# Altium PCB Sinistro_CLK_RevB.PcbDoc (part 6 of 6)
Units mil, origin at the board's own origin, x right, y up, seen from the top; angles counter-clockwise.
Board outline 5905.51 x 4330.71 mil, 10 copper layers (Top Layer (.GTL), MidLayer1 (*.G1), +12V (*.GP1), -12V (*.GP2), A & GND (*.GP3), Chassis E (*.GP4), +28V & VCC (*.GP5), MidLayer2 (*.G2), MidLayer3 (*.G3), Bottom Layer (.GBL)), stack 64.6 mil thick; 495 components, 327 nets, 1939 pads, 938 vias.
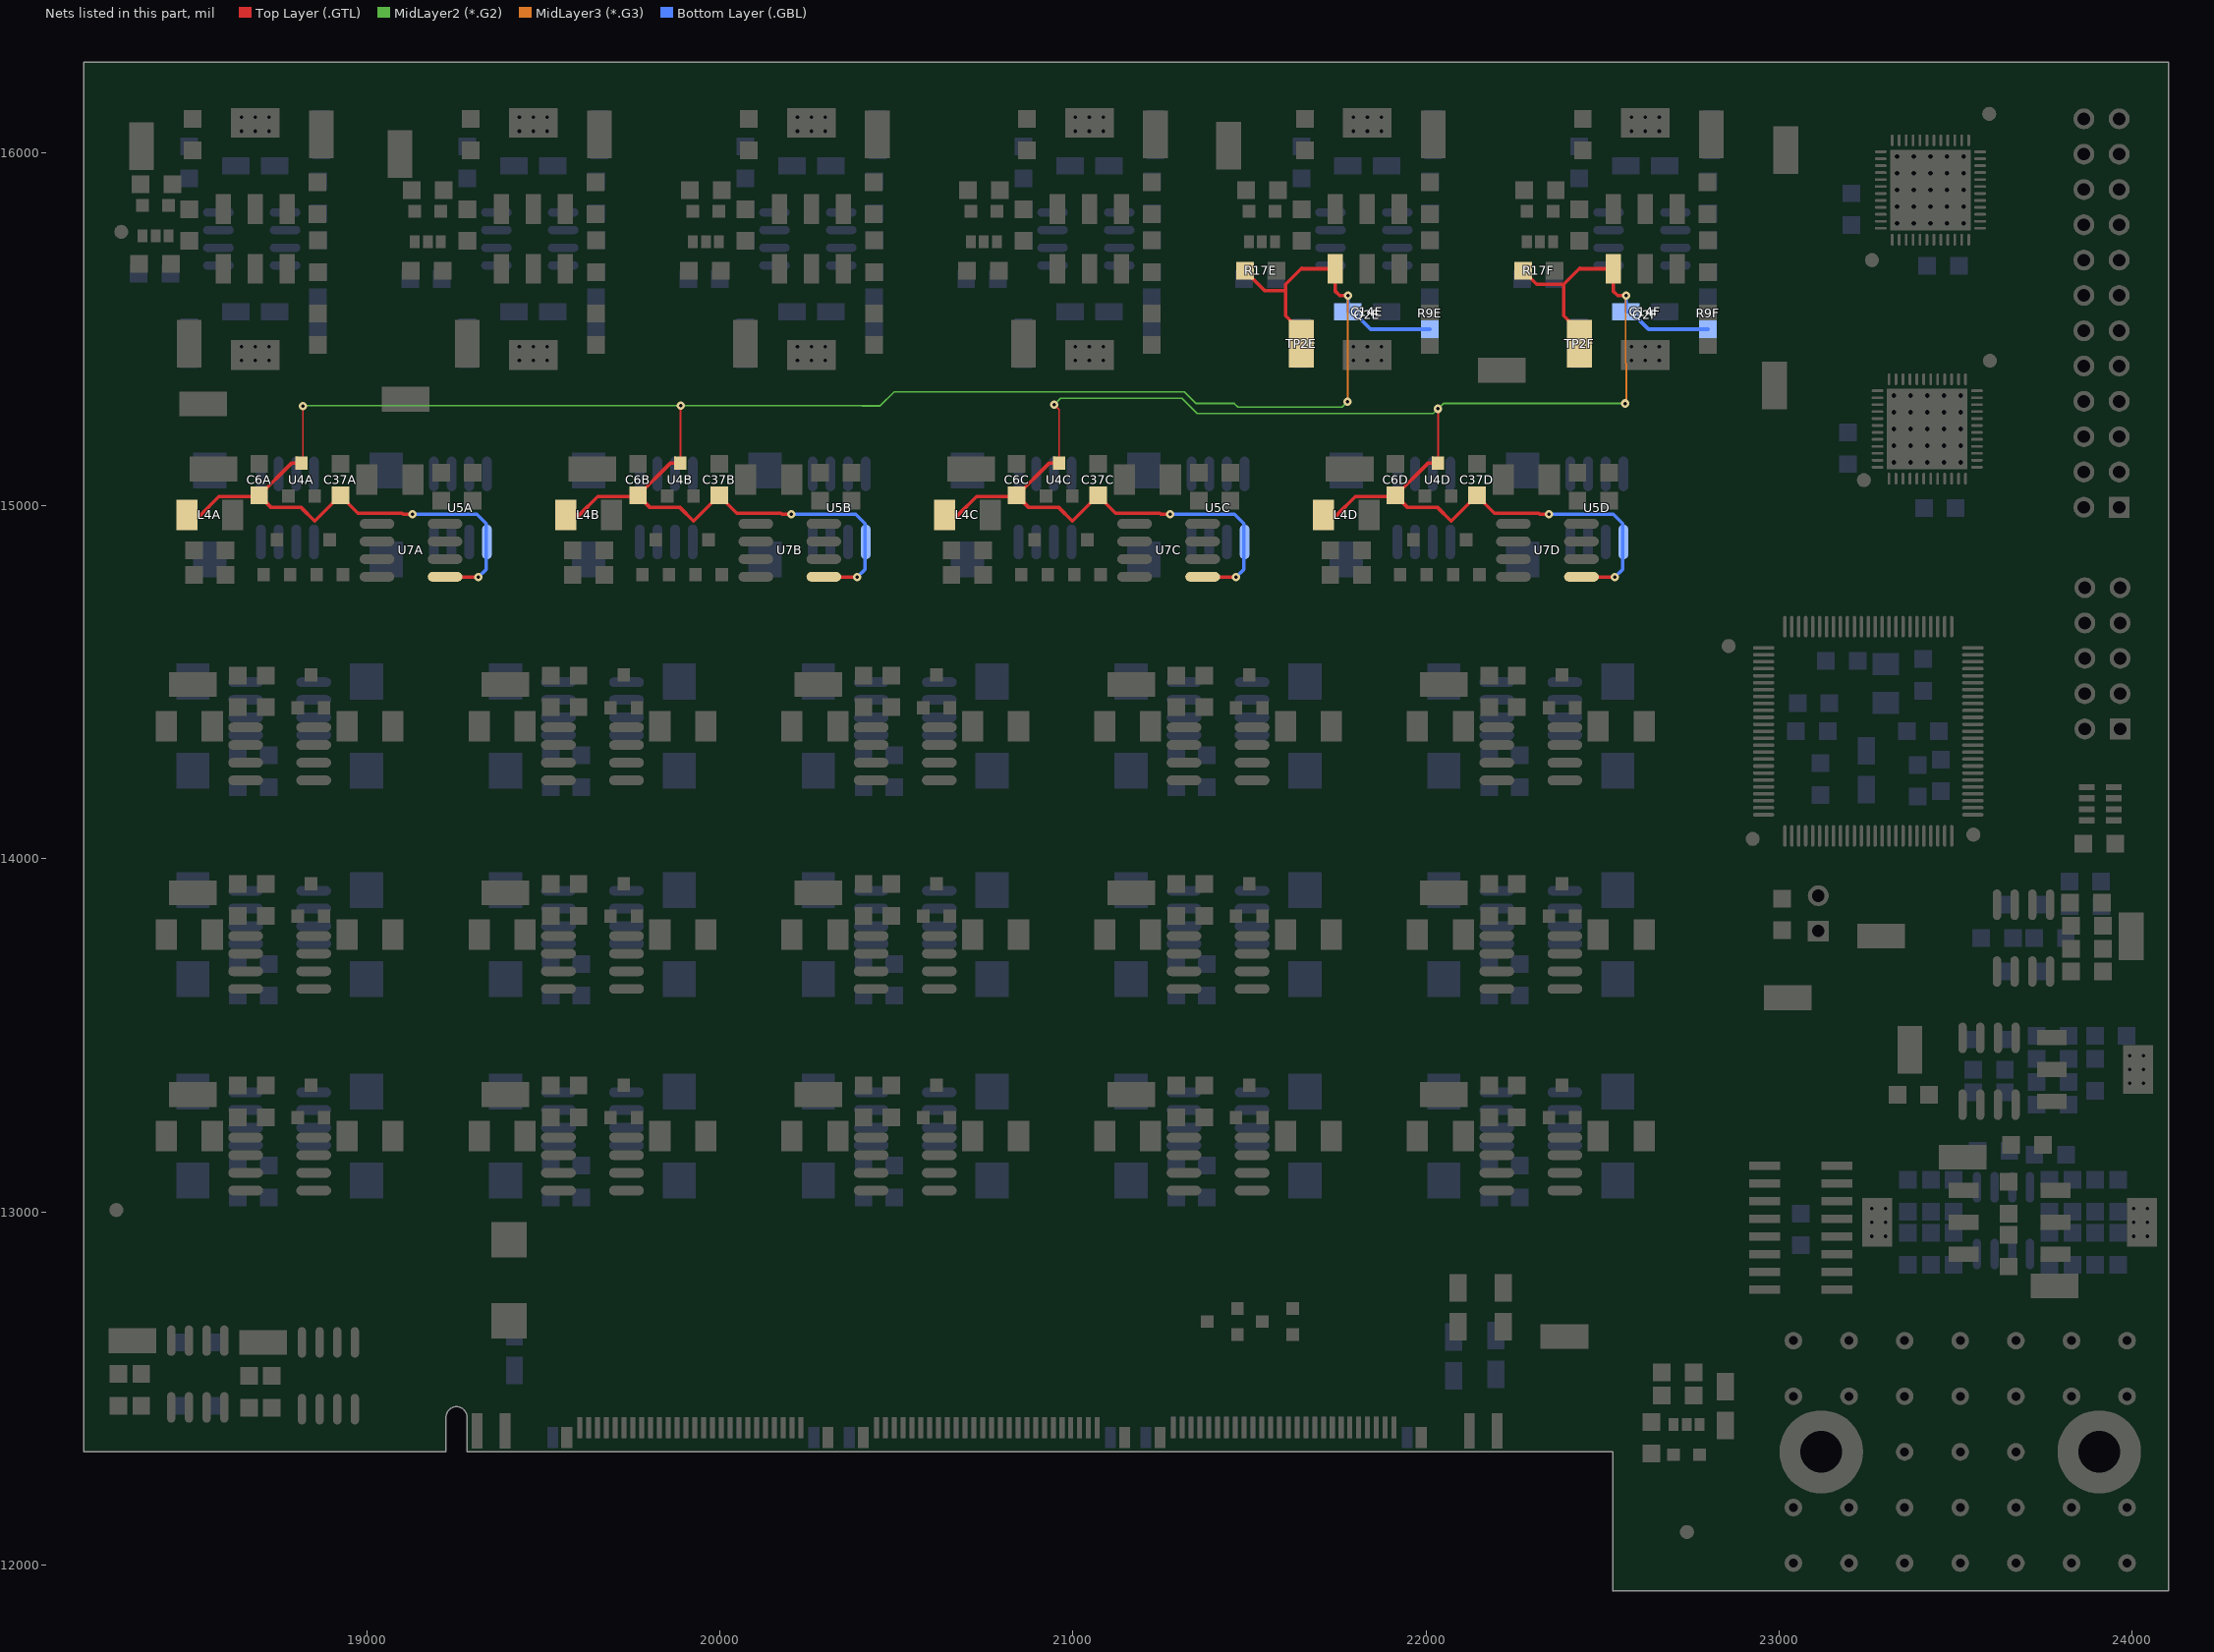
[diagram p14: the nets of this part, all layers, seen from the top]

## Via types
v1: diameter 24, hole 10, Top Layer (.GTL) to Bottom Layer (.GBL), 938 vias

## Nets (pads, with @x,y where several pads share a name; then routed paths per layer and width w, separated by ;. In a path a pad name is that pad's centre, name@x,y a point inside that pad or via, vN(x,y) a via of type N, cw(c..) or ccw(c..) an arc to the next point about the centre after c; other vN are vias at no path point) (continued)
VREFLO5: C6A.1 C6B.1 C14E.2 C37A.1 C37B.1 L4A.1 L4B.1 Q2E.3 R9E.1 R17E.2 TP2E.1 U4A.3 U4B.3 U5A.5 U5B.5 U7A.5 U7B.5 | length 7271.9
  Top Layer (.GTL) w5: U4A.3@18815.4,15119.57 18819,15123.17 v1(18819,15281) ; U4B.3@19888.24,15119.57 U4B.3@19891.83,15123.17 ; U4B.3@19889,15120.33 v1(19889,15283)
  Top Layer (.GTL) w10: L4A.1@18490.4,14973.31 18529.4,14973.31 18581.4,15025.31 18692.4,15025.31 C6A.1@18695.4,15028.31 ; U4A.3@18815.4,15119.57 18786.66,15119.57 C6A.1@18695.4,15028.31 ; v1(19130,14975) 19103.71,14975 19100.4,14978.31 18975.4,14978.31 C37A.1@18925.4,15028.31 18852.9,14955.81 18814.4,14994.31 18729.4,14994.31 C6A.1@18695.4,15028.31 ; U7A.5@19221.86,14798.31 19223.17,14797 v1(19316,14797) ; L4B.1@19563.24,14973.31 19602.24,14973.31 19654.24,15025.31 19765.24,15025.31 C6B.1@19768.24,15028.31 ; U4B.3@19888.24,15119.57 19859.5,15119.57 C6B.1@19768.24,15028.31 ; v1(20202.83,14975) 20176.54,14975 20173.24,14978.31 20048.24,14978.31 C37B.1@19998.24,15028.31 19925.74,14955.81 19887.24,14994.31 19802.24,14994.31 C6B.1@19768.24,15028.31 ; U7B.5@20294.69,14798.31 20296,14797 v1(20388.83,14797) ; R17E.2@21487.21,15665 21544.2,15608 21602.61,15608 ; TP2E.1@21646.9,15459.76 21646.9,15493.23 21602.61,15537.52 21602.61,15608 ; 21648.31,15672.09 21602.61,15626.38 21602.61,15608 ; 21650.01,15670.39 Q2E.3@21743.35,15670.4 21743.36,15606.42 21755.17,15594.61 v1(21778.79,15594.61)
  MidLayer2 (*.G2) w5: v1(18819,15281) 18821,15283 v1(19889,15283) 20402.84,15283 20403.34,15282.5 20454.5,15282.5 20494,15322 21316,15322 21349,15289 21456.84,15289 21467.34,15278.5 21762.74,15278.5 v1(21777.73,15293.49)
  MidLayer3 (*.G3) w5: v1@21778,15294 21777.73,15293.73 v1(21777.73,15293.49) 21778.04,15293.79 21778.04,15593.85 v1(21778.79,15594.61)
  Bottom Layer (.GBL) w10: v1(19130,14975) 19312,14975 19338,14949 19338,14819 v1(19316,14797) ; v1(20202.83,14975) 20384.83,14975 20410.83,14949 20410.83,14819 v1(20388.83,14797) ; v1@21778.91,15594.49 C14E.2@21778.91,15548.35 21793.55,15548.35 21842.76,15499.13 R9E.1@22011.07,15499.13
VREFLO6: C6C.1 C6D.1 C14F.2 C37C.1 C37D.1 L4C.1 L4D.1 Q2F.3 R9F.1 R17F.2 TP2F.1 U4C.3 U4D.3 U5C.5 U5D.5 U7C.5 U7D.5 | length 5933.4
  Top Layer (.GTL) w5: v1(20947,15286) 20961.07,15271.93 U4C.3@20961.07,15119.57 U4C.3@20964.67,15123.17 ; U4D.3@22033.9,15119.57 U4D.3@22037.5,15123.17 ; U4D.3@22034,15119.66 v1(22034,15274)
  Top Layer (.GTL) w10: L4C.1@20636.07,14973.31 20675.07,14973.31 20727.07,15025.31 20838.07,15025.31 C6C.1@20841.07,15028.31 ; U4C.3@20961.07,15119.57 20932.33,15119.57 C6C.1@20841.07,15028.31 ; v1(21275.67,14975) 21249.38,14975 21246.07,14978.31 21121.07,14978.31 C37C.1@21071.07,15028.31 20998.57,14955.81 20960.07,14994.31 20875.07,14994.31 C6C.1@20841.07,15028.31 ; U7C.5@21367.53,14798.31 21368.83,14797 v1(21461.67,14797) ; L4D.1@21708.91,14973.31 21747.91,14973.31 21799.91,15025.31 21910.91,15025.31 C6D.1@21913.91,15028.31 ; U4D.3@22033.9,15119.57 22005.17,15119.57 C6D.1@21913.91,15028.31 ; R17F.2@22274.61,15665 22313.23,15626.38 22390.01,15626.38 ; v1(22348.5,14975) 22322.21,14975 22318.91,14978.31 22193.91,14978.31 C37D.1@22143.91,15028.31 22071.41,14955.81 22032.91,14994.31 21947.91,14994.31 C6D.1@21913.91,15028.31 ; TP2F.1@22434.3,15459.76 22434.3,15493.23 22390.01,15537.52 22390.01,15626.38 ; U7D.5@22440.36,14798.31 22441.67,14797 v1(22534.5,14797) ; v1(22566.19,15594.61) 22542.57,15594.61 22530.76,15606.42 Q2F.3@22530.75,15670.39 22437.41,15670.39 22435.71,15672.09 22390.01,15626.38
  MidLayer2 (*.G2) w5: v1(20947,15286) 20965,15304 21308.54,15304 21352.04,15260.5 22020.5,15260.5 v1(22034,15274) 22049,15289 v1(22564,15289)
  MidLayer3 (*.G3) w5: v1@22564,15290 v1(22564,15289) 22567,15292 22567,15402.15 22565.44,15403.72 22565.44,15593.85 v1(22566.19,15594.61)
  Bottom Layer (.GBL) w10: v1(21275.67,14975) 21457.67,14975 21483.67,14949 21483.67,14819 v1(21461.67,14797) ; v1(22348.5,14975) 22530.5,14975 22556.5,14949 22556.5,14819 v1(22534.5,14797) ; v1@22566.31,15594.49 C14F.2@22566.31,15548.35 22580.95,15548.35 22630.16,15499.13 R9F.1@22798.47,15499.13
pads on no net: D1A.2 D1B.2 D1C.2 D1D.2 D2A.2 D2B.2 D2C.2 D2D.2 J1.0 J1.24 J1.26 J1.28 J1.30 J1.34 J1.35 J1.36 J1.37 J1.38 J1.39 J1.40 J1.43 J1.44 J1.45 J1.47 J1.48 J1.50 J1.55 J1.56 J1.57 J1.58 J1.59 J1.60 J1.61 J1.62 J1.65 J1.66 J1.67 J1.68 J1.69 J1.70 J1.71 J1.72 J1.75 J1.76 J1.77 J1.78 J1.79 J1.80 J1.81 J1.82 J1.85 J1.86 J1.87 J1.88 J1.89 J1.90 J1.91 J1.92 J1.96 J1.98 J1.100 J1.102 J1.108 P1.6 P1.7 P1.8 Q1A.2 Q1B.2 Q1C.2 Q1D.2 Q1E.2 Q1F.2 Q2A.2 Q2B.2 Q2C.2 Q2D.2 Q2E.2 Q2F.2 Q3.2 Q4.2 Q5.2 R3A.2 R3B.2 R3C.2 R3D.2 U2A.1 U2A.4 U2A.7 U2B.1 U2B.4 U2B.7 U2C.1 U2C.4 U2C.7 U2D.1 U2D.4 U2D.7 U2E.1 U2E.4 U2E.7 U2F.1 U2F.4 U2F.7 U2G.1 U2G.4 U2G.7 U2H.1 U2H.4 U2H.7 U2I.1 U2I.4 U2I.7 U2J.1 U2J.4 U2J.7 U2K.1 U2K.4 U2K.7 U2L.1 U2L.4 U2L.7 U2M.1 U2M.4 U2M.7 U2N.1 U2N.4 U2N.7 U2O.1 U2O.4 U2O.7 U3A.1 U3A.8 U3B.1 U3B.8 U3C.1 U3C.8 U3D.1 U3D.8 U3E.1 U3E.8 U3F.1 U3F.8 U3G.1 U3G.8 U3H.1 U3H.8 U3I.1 U3I.8 U3J.1 U3J.8 U3K.1 U3K.8 U3L.1 U3L.8 U3M.1 U3M.8 U3N.1 U3N.8 U3O.1 U3O.8 U5A.1 U5A.2 U5A.3 U5A.4 U5A.7 U5B.1 U5B.2 U5B.3 U5B.4 U5B.7 U5C.1 U5C.2 U5C.3 U5C.4 U5C.7 U5D.1 U5D.2 U5D.3 U5D.4 U5D.7 U6A.1 U6A.8 U6B.1 U6B.8 U6C.1 U6C.8 U6D.1 U6D.8 U7A.1 U7A.4 U7A.7 U7B.1 U7B.4 U7B.7 U7C.1 U7C.4 U7C.7 U7D.1 U7D.4 U7D.7 U9.1 U9.2 U9.3 U9.4 U9.5 U9.6 U9.7 U9.8 U9.15 U9.16 U9.17 U9.18 U9.19 U9.20 U9.21 U9.27 U9.28 U9.29 U9.30 U9.33 U9.34 U9.35 U9.36 U9.43 U9.47 U9.48 U9.49 U9.50 U9.91 U9.92 U9.97 U9.98 U9.99 U9.100 U13.3 U13.5 U13.6 U13.16 U13.17 U13.20 U13.21 U13.29 U13.30 U13.31 U13.32 U13.35 U15.1 U15.3 U15.5 U15.7 U15.8 U16.3 U16.5 U16.6 U16.16 U16.17 U16.20 U16.21 U16.29 U16.30 U16.31 U16.32 U16.35 U17.12

## Polygon pours and split planes (outlines as drawn)
+12V on +12V (*.GP1) (split plane): 24083.42,12726.1 22926,12726.1 22924.05,12725.71 22922.4,12724.6 22915.4,12717.6 22914.29,12715.95 22913.9,12714 22913.9,11946.4 22548.81,11946.4 22548.81,12320 22548.42,12323.92 22547.28,12327.69 22545.42,12331.17 22542.92,12334.21 22539.88,12336.71 22536.4,12338.57 22532.63,12339.71 22528.71,12340.1 19303.9,12340.1 19303.9,12418.43 19303.86,12418.89 19303.57,12423.98 19302.64,12429.46 19301.1,12434.81 19298.97,12439.95 19296.28,12444.82 19293.06,12449.35 19289.35,12453.5 19285.21,12457.21 19280.67,12460.43 19275.8,12463.12 19270.66,12465.25 19265.32,12466.79 19259.83,12467.72 19254.28,12468.03 19248.72,12467.72 19243.24,12466.79 19237.89,12465.25 19232.75,12463.12 19227.89,12460.43 19223.35,12457.21 19219.2,12453.5 19215.49,12449.35 19212.27,12444.82 19209.58,12439.95 19207.45,12434.81 19205.92,12429.46 19204.98,12423.98 19204.8,12420.78 19204.78,12420.64 19204.77,12420.17 19204.69,12418.85 19204.65,12418.43 19204.65,12418.42 19204.65,12340.1 18218.1,12340.1 18218.1,16236.1 24083.42,16236.1
E on +12V (*.GP1) (split plane): 24083.42,11946.4 22924.1,11946.4 22924.1,12711.89 22928.11,12715.9 24083.42,12715.9
-12V on -12V (*.GP2) (split plane): 24083.42,12722.02 24083,12722.1 22921,12722.1 22919.05,12721.71 22917.4,12720.6 22916.29,12718.95 22915.9,12717 22916.29,12715.05 22917.4,12713.4 22918.9,12711.89 22918.9,11946.4 22548.81,11946.4 22548.81,12320 22548.42,12323.92 22547.28,12327.69 22545.42,12331.17 22542.92,12334.21 22539.88,12336.71 22536.4,12338.57 22532.63,12339.71 22528.71,12340.1 19303.9,12340.1 19303.9,12418.43 19303.86,12418.89 19303.57,12423.98 19302.64,12429.46 19301.1,12434.81 19298.97,12439.95 19296.28,12444.82 19293.06,12449.35 19289.35,12453.5 19285.21,12457.21 19280.67,12460.43 19275.8,12463.12 19270.66,12465.25 19265.32,12466.79 19259.83,12467.72 19254.28,12468.03 19248.72,12467.72 19243.24,12466.79 19237.89,12465.25 19232.75,12463.12 19227.89,12460.43 19223.35,12457.21 19219.2,12453.5 19215.49,12449.35 19212.27,12444.82 19209.58,12439.95 19207.45,12434.81 19205.92,12429.46 19204.98,12423.98 19204.8,12420.78 19204.78,12420.64 19204.77,12420.17 19204.69,12418.85 19204.65,12418.43 19204.65,12418.42 19204.65,12340.1 18218.1,12340.1 18218.1,16236.1 24083.42,16236.1
E on -12V (*.GP2) (split plane): 24083.42,11946.4 22929.1,11946.4 22929.1,12711.9 24083,12711.9 24083.42,12711.98
A on A & GND (*.GP3) (split plane): 24083.42,14891.09 22687,14891.09 22684.39,14890.74 22681.96,14889.73 22679.87,14888.13 22678.26,14886.04 22677.26,14883.61 22676.91,14881 22676.91,13938 22677.26,13935.39 22678.26,13932.96 22679.87,13930.87 22681.96,13929.27 22684.39,13928.26 22687,13927.91 23041.9,13927.91 23041.9,13845 23042.29,13843.05 23043.4,13841.4 23045.05,13840.29 23047,13839.9 23174,13839.9 23175.95,13840.29 23177.6,13841.4 23178.41,13842.59 23179.6,13843.4 23180.71,13845.05 23181.1,13847 23181.1,13927.91 24010.91,13927.91 24010.91,13856.18 23981.87,13827.13 23980.26,13825.04 23979.26,13822.61 23978.91,13820 23978.91,12728.09 22381,12728.09 22378.39,12727.74 22375.96,12726.74 22373.87,12725.13 22372.26,12723.04 22371.26,12720.61 22370.91,12718 22370.91,12543.09 21906.09,12543.09 21906.09,12709.82 21907.13,12710.87 21908.74,12712.96 21909.74,12715.39 21910.09,12718 21909.74,12720.61 21908.74,12723.04 21907.13,12725.13 21905.04,12726.74 21902.61,12727.74 21900,12728.09 21897.39,12727.74 21894.96,12726.74 21892.87,12725.13 21891.82,12724.09 19484.18,12724.09 19483.13,12725.13 19481.04,12726.74 19478.61,12727.74 19476,12728.09 19473.39,12727.74 19470.96,12726.74 19468.87,12725.13 19467.26,12723.04 19466.26,12720.61 19465.91,12718 19465.91,12340.1 19303.9,12340.1 19303.9,12418.43 19303.86,12418.89 19303.57,12423.98 19302.64,12429.46 19301.1,12434.81 19298.97,12439.95 19296.28,12444.82 19293.06,12449.35 19289.35,12453.5 19285.21,12457.21 19280.67,12460.43 19275.8,12463.12 19270.66,12465.25 19265.32,12466.79 19259.83,12467.72 19254.28,12468.03 19248.72,12467.72 19243.24,12466.79 19237.89,12465.25 19232.75,12463.12 19227.89,12460.43 19223.35,12457.21 19219.2,12453.5 19215.49,12449.35 19212.27,12444.82 19209.58,12439.95 19207.45,12434.81 19205.92,12429.46 19204.98,12423.98 19204.8,12420.78 19204.78,12420.64 19204.77,12420.17 19204.69,12418.85 19204.65,12418.43 19204.65,12418.42 19204.65,12340.1 18218.1,12340.1 18218.1,16236.1 24083.42,16236.1
GND on A & GND (*.GP3) (split plane): 24083.42,12559.1 22913,12559.1 22911.05,12558.71 22909.4,12557.6 22908.29,12555.95 22907.9,12554 22907.9,11946.4 22548.81,11946.4 22548.81,12320 22548.42,12323.92 22547.28,12327.69 22545.42,12331.17 22542.92,12334.21 22539.88,12336.71 22536.4,12338.57 22532.63,12339.71 22528.71,12340.1 19486.09,12340.1 19486.09,12703.91 21885.91,12703.91 21885.91,12530 21886.26,12527.39 21887.26,12524.96 21888.87,12522.87 21890.96,12521.26 21893.39,12520.26 21896,12519.91 21898.61,12520.26 21901.04,12521.26 21903.13,12522.87 21903.18,12522.91 22381,12522.91 22383.61,12523.26 22386.04,12524.26 22388.13,12525.87 22389.74,12527.96 22390.74,12530.39 22391.09,12533 22391.09,12707.91 23989,12707.91 23991.61,12708.26 23994.04,12709.26 23996.13,12710.87 23997.74,12712.96 23998.74,12715.39 23999.09,12718 23999.09,13815.82 24028.13,13844.87 24029.74,13846.96 24030.33,13848.38 24030.74,13849.39 24031.09,13852 24031.09,13938 24030.74,13940.61 24029.74,13943.04 24028.13,13945.13 24026.04,13946.73 24023.61,13947.74 24021,13948.09 23177,13948.09 23174.39,13947.74 23171.96,13946.73 23169.87,13945.13 23168.87,13944.13 23167.26,13942.04 23166.26,13939.61 23165.91,13937 23166.26,13934.39 23167.26,13931.96 23168.87,13929.87 23170.9,13928.31 23170.9,13850.1 23052.1,13850.1 23052.1,13928 23051.86,13929.19 23052.04,13929.27 23054.13,13930.87 23055.74,13932.96 23056.74,13935.39 23057.09,13938 23056.74,13940.61 23055.74,13943.04 23054.13,13945.13 23052.04,13946.73 23049.61,13947.74 23047,13948.09 22697.09,13948.09 22697.09,14870.91 24083.42,14870.91
E on A & GND (*.GP3) (split plane): 24083.42,11946.4 22918.1,11946.4 22918.1,12548.9 24083.42,12548.9
E on Chassis E (*.GP4) (split plane): 24083.42,13602.1 23569,13602.1 23567.05,13601.71 23565.4,13600.6 23564.29,13598.95 23563.9,13597 23563.9,13201.1 23029,13201.1 23027.05,13200.71 23025.4,13199.6 23024.29,13197.95 23023.9,13196 23023.9,12727 23024.29,12725.05 23025.4,12723.4 23027.05,12722.29 23029,12721.9 24083.42,12721.9 24083.42,11946.4 22548.81,11946.4 22548.81,12320 22548.42,12323.92 22547.28,12327.69 22545.42,12331.17 22542.92,12334.21 22539.88,12336.71 22536.4,12338.57 22532.63,12339.71 22528.71,12340.1 19303.9,12340.1 19303.9,12418.43 19303.86,12418.89 19303.57,12423.98 19302.64,12429.46 19301.1,12434.81 19298.97,12439.95 19296.28,12444.82 19293.06,12449.35 19289.35,12453.5 19285.21,12457.21 19280.67,12460.43 19275.8,12463.12 19270.66,12465.25 19265.32,12466.79 19259.83,12467.72 19254.28,12468.03 19248.72,12467.72 19243.24,12466.79 19237.89,12465.25 19232.75,12463.12 19227.89,12460.43 19223.35,12457.21 19219.2,12453.5 19215.49,12449.35 19212.27,12444.82 19209.58,12439.95 19207.45,12434.81 19205.92,12429.46 19204.98,12423.98 19204.8,12420.78 19204.78,12420.64 19204.77,12420.17 19204.69,12418.85 19204.65,12418.43 19204.65,12418.42 19204.65,12340.1 18218.1,12340.1 18218.1,16236.1 24083.42,16236.1
Q1_CB on Chassis E (*.GP4) (split plane): 19866.13,15769.98 19088.93,15769.98 19088.93,16153.48 19866.13,16153.48
Q1_CA on Chassis E (*.GP4) (split plane): 19078.73,15769.98 18301.52,15769.98 18301.52,16153.48 19078.73,16153.48
Q2_CF on Chassis E (*.GP4) (split plane): 23015.74,15376.28 22238.53,15376.28 22238.53,15759.78 23015.74,15759.78
Q1_CC on Chassis E (*.GP4) (split plane): 20653.53,15769.98 19876.33,15769.98 19876.33,16153.48 20653.53,16153.48
Q1_CF on Chassis E (*.GP4) (split plane): 23015.74,15769.98 22238.53,15769.98 22238.53,16153.48 23015.74,16153.48
Q1_CE on Chassis E (*.GP4) (split plane): 22228.34,15769.98 21451.13,15769.98 21451.13,16153.48 22228.34,16153.48
Q1_CD on Chassis E (*.GP4) (split plane): 21440.93,15769.98 20663.73,15769.98 20663.73,16153.48 21440.93,16153.48
Q2_CE on Chassis E (*.GP4) (split plane): 22228.34,15376.28 21451.13,15376.28 21451.13,15759.78 22228.34,15759.78
Q2_CB on Chassis E (*.GP4) (split plane): 19866.13,15376.28 19088.93,15376.28 19088.93,15759.78 19866.13,15759.78
Q2_CA on Chassis E (*.GP4) (split plane): 19078.73,15376.28 18301.52,15376.28 18301.52,15759.78 19078.73,15759.78
Q2_CD on Chassis E (*.GP4) (split plane): 21440.93,15376.28 20663.73,15376.28 20663.73,15759.78 21440.93,15759.78
Q2_CC on Chassis E (*.GP4) (split plane): 20653.53,15376.28 19876.33,15376.28 19876.33,15759.78 20653.53,15759.78
NetQ3_4 on Chassis E (*.GP4) (split plane): 23563.9,12732.1 23034.1,12732.1 23034.1,13190.9 23563.9,13190.9
NetQ4_4 on Chassis E (*.GP4) (split plane): 24083.42,12732.1 23574.1,12732.1 23574.1,13190.9 24083.42,13190.9
NetQ5_4 on Chassis E (*.GP4) (split plane): 24083.42,13201.1 23574.1,13201.1 23574.1,13591.9 24083.42,13591.9
VCC on +28V & VCC (*.GP5) (split plane): 24083.42,13675.09 22914,13675.09 22911.39,13674.74 22908.96,13673.73 22906.87,13672.13 22905.26,13670.04 22904.26,13667.61 22903.91,13665 22903.91,12702.09 19271.2,12702.09 19269.61,12702.74 19267,12703.09 19264.39,12702.74 19261.96,12701.74 19259.87,12700.13 19258.26,12698.04 19257.26,12695.61 19256.91,12693 19256.91,12660.89 19256.26,12660.04 19255.26,12657.61 19254.91,12655 19254.91,12563 19255.26,12560.39 19256.26,12557.96 19257.87,12555.87 19259.96,12554.26 19262.39,12553.26 19265,12552.91 22910.9,12552.91 22910.9,11946.4 22548.81,11946.4 22548.81,12320 22548.42,12323.92 22547.28,12327.69 22545.42,12331.17 22542.92,12334.21 22539.88,12336.71 22536.4,12338.57 22532.63,12339.71 22528.71,12340.1 19303.9,12340.1 19303.9,12418.43 19303.86,12418.89 19303.57,12423.98 19302.64,12429.46 19301.1,12434.81 19298.97,12439.95 19296.28,12444.82 19293.06,12449.35 19289.35,12453.5 19285.21,12457.21 19280.67,12460.43 19275.8,12463.12 19270.66,12465.25 19265.32,12466.79 19259.83,12467.72 19254.28,12468.03 19248.72,12467.72 19243.24,12466.79 19237.89,12465.25 19232.75,12463.12 19227.89,12460.43 19223.35,12457.21 19219.2,12453.5 19215.49,12449.35 19212.27,12444.82 19209.58,12439.95 19207.45,12434.81 19205.92,12429.46 19204.98,12423.98 19204.8,12420.78 19204.78,12420.64 19204.77,12420.17 19204.69,12418.85 19204.65,12418.43 19204.65,12418.42 19204.65,12340.1 18218.1,12340.1 18218.1,16236.1 24083.42,16236.1
+28V on +28V & VCC (*.GP5) (split plane): 24083.42,12573.09 22919.89,12573.09 22919.04,12573.74 22916.61,12574.74 22914,12575.09 22911.39,12574.74 22908.96,12573.74 22908.11,12573.09 19275.09,12573.09 19275.09,12650.11 19275.74,12650.96 19276.74,12653.39 19277.09,12656 19277.09,12681.91 22912,12681.91 22914.61,12682.26 22917.04,12683.26 22919.13,12684.87 22921.13,12686.87 22922.74,12688.96 22923.33,12690.38 22923.74,12691.39 22924.09,12694 22924.09,13654.91 24083.42,13654.91
E on +28V & VCC (*.GP5) (split plane): 24083.42,11946.4 22921.1,11946.4 22921.1,12552.91 24083.42,12552.91

## Other copper
Top Layer (.GTL):
  rectangle net E: 22922.41,11926.3 24103.51,12713.7
  text "*.GTL - TOP LAYER GERBER DATA" at 19555,9960.99 h80
MidLayer1 (*.G1):
  text "*.G1 - MID LAYER 1 GERBER DATA" at 19555,9960.99 h80
MidLayer2 (*.G2):
  text "*.G2 - MID LAYER 2 GERBER DATA" at 19555,9960.99 h80
MidLayer3 (*.G3):
  text "*.G3 - MID LAYER 3 GERBER DATA" at 19555,9960.99 h80
Bottom Layer (.GBL):
  rectangle net E: 22922.41,11926.3 24103.51,12713.7
  text "175-00002 Rev 2, SINISTRO CLK BOARD" at 21716.81,12837.22 h30
  text "Las Cumbres Observatory" at 21705,12774.23 h30
  text "*.GBL - BOTTOM LAYER GERBER DATA" at 19555,9960.99 h80
+12V (*.GP1) (plane layer: these items are gaps in the copper):
  lines w10: 22919,11925.49 22919,12714 22926,12721 24099.51,12721 24103.51,12725
  text "*.GP1 - INTERNAL PLANE LAYER 1 GERBER DATA" at 19555,9960.99 h80
-12V (*.GP2) (plane layer: these items are gaps in the copper):
  lines w10: 22924,11925.49 22924,12714 22921,12717 24083,12717
  text "*.GP2 - INTERNAL PLANE LAYER 2 GERBER DATA" at 19555,9960.99 h80
Chassis E (*.GP4) (plane layer: these items are gaps in the copper):
  lines w10: 23569,12727 23569,13597 24096.51,13597 24103.51,13604 ; 24088,13196 23029,13196 23029,12727 24097.51,12727 ; 18296.43,15764.88 19083.83,15764.88 ; 18296.43,15764.88 18296.43,15371.18 19083.83,15371.18 ; 18296.43,15764.88 18296.43,16158.58 19083.83,16158.58 ; 19083.83,15371.18 19083.83,15764.88 ; 19083.83,15371.18 19871.23,15371.18 ; 19083.83,15764.88 19871.23,15764.88 ; 19083.83,15764.88 19083.83,16158.58 ; 19083.83,16158.58 19871.23,16158.58 ; 19871.23,15371.18 19871.23,15764.88 ; 19871.23,15371.18 20658.63,15371.18 ; 19871.23,15764.88 20658.63,15764.88 ; 19871.23,15764.88 19871.23,16158.58 ; 19871.23,16158.58 20658.63,16158.58 ; 20658.63,15371.18 20658.63,15764.88 ; 20658.63,15371.18 21446.03,15371.18 ; 20658.63,15764.88 21446.03,15764.88 ; 20658.63,15764.88 20658.63,16158.58 ; 20658.63,16158.58 21446.03,16158.58 ; 21446.03,15371.18 21446.03,15764.88 ; 21446.03,15371.18 22233.43,15371.18 ; 21446.03,15764.88 22233.43,15764.88 ; 21446.03,15764.88 21446.03,16158.58 ; 21446.03,16158.58 22233.43,16158.58 ; 22233.43,15371.18 22233.43,15764.88 ; 22233.43,15371.18 23020.83,15371.18 23020.83,15764.88 ; 22233.43,15764.88 23020.83,15764.88 ; 22233.43,15764.88 22233.43,16158.58 ; 22233.43,16158.58 23020.83,16158.58 23020.83,15764.88
  text "*.GP4 - INTERNAL PLANE LAYER 4 GERBER DATA" at 19555,9960.99 h80
A & GND (*.GP3) (plane layer: these items are gaps in the copper):
  lines w7: 23174,13845 23176,13847 ; 23176,13937 23177,13938
  lines w10: 22913,11925.49 22913,12554 24103.51,12554 ; 23174,13845 23047,13845 ; 23176,13847 23176,13937 ; 23047,13845 23047,13928 23047,13845
  lines w20: 19476,12320 19476,12718 19480,12714 21896,12714 ; 21900,12718 21896,12714 ; 23047,13938 22687,13938 22687,14881 24103.51,14881 ; 23176,13937 23177,13938 24021,13938 24021,13852 23989,13820 23989,12718 22381,12718 22381,12533 21899,12533 21896,12530 21896,12714 ; 24101.51,13937 24103.51,13939 ; 24101.51,13937 24103.51,13939 ; 24101.51,13937 24103.51,13939
  text "*.GP3- INTERNAL PLANE LAYER 3 GERBER DATA" at 19555,9960.99 h80
+28V & VCC (*.GP5) (plane layer: these items are gaps in the copper):
  lines w10: 22916,12563 22916,11944 22919,11941
  lines w20: 19265,12655 19265,12563 22916,12563 ; 19266,12655 19267,12656 19267,12693 19268,12692 22912,12692 22914,12694 22914,13665 24101.51,13665 24103.51,13663 ; 24097.51,12563 22916,12563 ; 22914,12565 22916,12563 ; 22914,12565 22916,12563 ; 22914,12565 22916,12563
  text "*.GP5- INTERNAL PLANE LAYER 5 GERBER DATA" at 19555,9960.99 h80

## Silkscreen, mask and mechanical layers (free items; w line width, h text height)
Top Overlay:
  rectangle: 20601,12595 20841,12760
  text "AGND" at 21407,16116.03 h30
  text "AGND" at 18309,16107 h30
  text "AGND" at 22999,16088 h30
  text "AGND" at 19037,16075 h30
  text "+5ANA" at 22139,15433.42 h30
  text "DGND" at 22937,15426 h30
  text "-12V" at 19047,15347 h30
  text "+12V" at 18477,15332 h30
  text "JTAG" at 23772,14302 h50 r90
  text "D" at 23187,13882 h30
  text "VCC" at 23245,13830 h30
  text "A" at 23183,13784 h30
  text "+28V" at 22971,13654 h30
  text "780-00002" at 20163,12800 h60
  text "-5ANA" at 22308,12704 h30
  text "SCH Rev" at 20159,12647 h60
  text "*.GTO - TOP OVERLAY GERBER DATA" at 19555,9960.99 h80
Bottom Overlay:
  text "*GBO BOTTOM OVERLAY GERBER DATA" at 19555,9960.99 h80
Top Paste:
  text "*.GTP - TOP-SIDE SOLDER PASTE MASK" at 19554.99,9960.98 h80
Bottom Paste:
  text "*.GBP - BOTTOM-SIDE SOLDER PASTE MASK" at 19554.99,9960.98 h80
Top Solder:
  rectangle: 22922.41,11926.3 24103.51,12713.7
  text "*.GTS - TOP SOLDER MASK GERBER DATA" at 19555,9960.99 h80
Bottom Solder:
  rectangle: 22922.41,11926.3 24103.51,12713.7
  text "*.GBS - BOTTOM SOLDER MASK GERBER DATA" at 19555,9960.99 h80
Mechanical 1:
  lines w29.53: 19009.02,12320 18198,12320 18198,16256.2 22922.41,16256.2 24103.51,16256.2 24103.51,11926.3 22528.71,11926.3 ; 22528.71,11925.49 22528.71,12320
Mechanical 2:
  lines w10: 10567,3924 10567,19924 31567,19924 31567,3924 10567,3924 ; 27512,4030 ccw(c27562,4030) 27562,3980 27892,3980 ccw(c27892,4020) 27932,4020 27932,4190 ccw(c27892,4190) 27892,4230 27512,4230 27512,4030 ; 27512,4320 ccw(c27562,4320) 27562,4270 31462,4270 ccw(c31462,4320) 31512,4320 31512,4510 ccw(c31462,4510) 31462,4560 27512,4560 27512,4320 ; 27512,4650 ccw(c27562,4650) 27562,4600 29442,4600 ccw(c29442,4650) 29492,4650 29492,4800 ccw(c29442,4800) 29442,4850 27512,4850 27512,4650 ; 27512,4930 ccw(c27552,4930) 27552,4890 28362,4890 ccw(c28362,4940) 28412,4940 28412,5090 ccw(c28362,5090) 28362,5140 27512,5140 27512,4930 ; 27972,4020 ccw(c28012,4020) 28012,3980 29972,3980 ccw(c29972,4020) 30012,4020 30012,4190 ccw(c29972,4190) 29972,4230 27972,4230 27972,4020 ; 28452,4940 ccw(c28502,4940) 28502,4890 29442,4890 ccw(c29442,4940) 29492,4940 29492,5090 ccw(c29442,5090) 29442,5140 28452,5140 28452,4940 ; 29532,4650 ccw(c29582,4650) 29582,4600 31462,4600 ccw(c31462,4650) 31512,4650 31512,4800 ccw(c31462,4800) 31462,4850 29532,4850 29532,4650 ; 29532,4940 ccw(c29582,4940) 29582,4890 30522,4890 ccw(c30522,4940) 30572,4940 30572,5090 ccw(c30522,5090) 30522,5140 29532,5140 29532,4940 ; 30052,4030 ccw(c30102,4030) 30102,3980 30432,3980 ccw(c30432,4020) 30472,4020 30472,4190 ccw(c30432,4190) 30432,4230 30052,4230 30052,4030 ; 30512,4020 ccw(c30552,4020) 30552,3980 31462,3980 ccw(c31462,4030) 31512,4030 31512,4180 ccw(c31462,4180) 31462,4230 30512,4230 30512,4020 ; 30612,4940 ccw(c30662,4940) 30662,4890 31462,4890 ccw(c31462,4940) 31512,4940 31512,5090 ccw(c31462,5090) 31462,5140 30612,5140 30612,4940
  lines w14: 11307,8987 15817,8987 ; 11307,9234.7 15817,9234.7 ; 11247,6575 ccw(c11327,6575) 11327,6495 15797,6495 ccw(c15797,6575) 15877,6575 15877,9397 ccw(c15797,9397) 15797,9477 11327,9477 ccw(c11327,9397) 11247,9397 11247,6575
  lines w20: 10587.06,4569.88 cw(c10637,4495) 10637,4585 11097,4585 cw(c11097,4495) 11187,4495 11187,4445 ccw(c11197,4445) 11197,4435 13837,4435 cw(c13837,4345) 13927,4345 13927,4005 cw(c13837,4005) 13911.88,3955.06 ; 27468.17,3940.02 cw(c27562,4030) 27432,4030 27432,5700 cw(c27562,5700) 27562,5830 31462,5830 cw(c31462,5700) 31550.66,5795.08 ; 10587,4005 ccw(c10637,4005) 10637,3955 13837,3955 ccw(c13837,4005) 13887,4005 13887,4345 ccw(c13837,4345) 13837,4395 11197,4395 cw(c11197,4445) 11147,4445 11147,4495 ccw(c11097,4495) 11097,4545 10637,4545 ccw(c10637,4495) 10587,4495 10587,4005 ; 18097,4104 ccw(c18227,4104) 18227,3974 22967,3974 ccw(c22967,4104) 23097,4104 23097,5694 ccw(c22967,5694) 22967,5824 18227,5824 ccw(c18227,5694) 18097,5694 18097,4104 ; 27472,4030 ccw(c27562,4030) 27562,3940 31462,3940 ccw(c31462,4030) 31552,4030 31552,5700 ccw(c31462,5700) 31462,5790 27562,5790 ccw(c27562,5700) 27472,5700 27472,4030
  lines w24: 20647,4134 20797,4134 ; 20647,4384 20797,4384 ; 20647,4634 20797,4634 ; 20647,4884 20797,4884 ; 20647,5134 20797,5134
  lines w30: 10067,3424 10067,20424 32067,20424 32067,3424 10067,3424
  lines w50: 27657,5289 29307,5289 ; 27657,5669 29307,5669 ; 29307,5289 29307,5669 ; 29307,5289 27647,5289 27647,5669 29307,5669
  text "NOTES (UNLESS OTHERWISE SPECIFIED):" at 10887,19400 h90
  text "GENERAL" at 10987,19200 h90
  text "1)" at 11087,18999.95 h75
  text "PCB IS 10-LAYER, .062\" THICK." at 11287,18999.97 h75
  text "2)" at 11087,18849.95 h75
  text "CONSTRUCTION IS SOLDER-MASK-OVER-BARE-COPPER (SMOBC)." at 11287,18849.95 h75
  text "3)" at 11087,18699.95 h75
  text "ACCEPTABILITY SHALL BE BASED ON IPC-A-600, CLASS 2." at 11287,18699.95 h75
  text "4)" at 11087,18549.95 h75
  text "THE FOLLOWING GERBER RS274X PHOTO TOOL FILES SHALL BE USED TO DEFINE ALL CIRCUIT FEATURES:" at 11287,18549.95 h75
  text "*.GTL - TOP LAYER GERBER DATA" at 11461,18360 h80
  text "*.G1 - MID LAYER 1 GERBER DATA" at 11461,18169.73 h80
  text "*.GP1- INTERNAL PLANE LAYER 1 GERBER DATA" at 11461,17979.47 h80
  text "*.GP2 - INTERNAL PLANE LAYER 2 GERBER DATA" at 11461,17789.2 h80
  text "*.GP3- INTERNAL PLANE LAYER 3 GERBER DATA" at 11461,17598.93 h80
  text "*.GP4 - INTERNAL PLANE LAYER 4 GERBER DATA" at 11461,17408.67 h80
  text "*.GP5 - INTERNAL PLANE LAYER 5 GERBER DATA" at 11461,17218.4 h80
  text "*.G2 - MID LAYER 2 GERBER DATA" at 11461,17028.13 h80
  text "*.G3 - MID LAYER 3 GERBER DATA" at 11461,16837.87 h80
  text "*.GBL - BOTTOM LAYER GERBER DATA" at 11461,16647.6 h80
  text "*GBO - BOTTOM OVERLAY GERBER DATA" at 11461,16457.33 h80
  text "*.GBP - BOTTOM-SIDE SOLDER PASTE MASK" at 11460.99,16267.06 h80
  text "*.GBS - BOTTOM SOLDER MASK GERBER DATA" at 11461,16076.8 h80
  text "*.GTO - TOP OVERLAY GERBER DATA" at 11461,15886.53 h80
  text "*.GTP - TOP-SIDE SOLDER PASTE MASK" at 11460.99,15696.26 h80
  text "*.GTS - TOP SOLDER MASK GERBER DATA" at 11461,15506 h80
  text "5)" at 11025,15284.23 h75
  text "THE PHOTO TOOL SHALL NOT BE COMPENSATED WITHOUT PRIOR ENGINEERING APPROVAL." at 11225,15284.23 h75
  text "PCB DESIGNER: RICH LOBDILL   PH (805) 880-1621  FAX (805) 961-1792." at 11225,15134.28 h75
  text "FABRICATION TOLERANCES" at 11045,14842 h90
  text "6)" at 11145,14641.95 h75
  text "END PRODUCT CONDUCTOR WIDTHS AND PAD DIAMETERS SHALL NOT VARY MORE THAN" at 11345,14641.95 h75
  text "0.002\" FROM THE 1:1 DIMENSIONS OF THE MASTER ARTWORK." at 11345,14492 h75
  text "7)" at 11145,14341.95 h75
  text "THE CONDUCTIVE PATTERN SHALL BE POSITIONED SO THAT THE LOCATION OF ANY PAD OR" at 11345,14341.95 h75
  text "LAND SHALL BE WITHIN 0.005\" DIAMETER TO THE TRUE POSITION OF THE HOLE IT CIRCUMSCRIBES." at 11345,14192 h75
  text "8.1)" at 11120,14061 h75
  text "DRILL TOLERANCES +/- 0.003\"" at 11347,14053 h75
  text "8.2)" at 11108,13917 h75
  text "ALL DRILL HOLE SIZES AND TOLERANCES APPLY AFTER PLATING." at 11345,13909.95 h75
  text "9)" at 11145,13759.95 h75
  text "THE MINIMUM ANNULAR RING SHALL BE 0.005\"." at 11345,13759.95 h75
  text "10)" at 11090,13609.95 h75
  text "BOW AND TWIST SHALL NOT EXCEED 0.010\" PER INCH." at 11345,13609.95 h75
  text "11)" at 11100,13459.95 h75
  text "FOR PCB ROUTING DIMENSIONS: .XXX = +/-.005\"  .XX = +/-.020\"" at 11345,13459.95 h75
  text "MATERIAL" at 11045,13260 h90
  text "12)" at 11090,13059.95 h75
  text "BASE MATERIAL IS FR4 EPOXY FIBERGLASS" at 11352,13054 h75
  text "SEE STACK-UP LEGEND FOR COPPER CLADDING CALL OUTS" at 11352,12914 h75
  text "13)" at 11090,12909.95 h75
  text "PLATING" at 11045,12710 h90
  text "14)" at 11090,12514.95 h75
  text "ALL HOLES AND CONDUCTIVE SURFACES SHALL BE PLATED WITH A MINIMUM OF 0.001\" COPPER." at 11345,12514.95 h75
  text "15)" at 11090,12364.95 h75
  text "AFTER SOLDERMASK, ALL EXPOSED HOLES AND CONDUCTIVE SURFACES SHALL BE COATED" at 11345,12364.95 h75
  text "WITH A GOLD IMMERSION PLATING TO PRESERVE SOLDERABILITY." at 11352,12214 h75
  text "COATINGS" at 11045,12015 h90
  text "16)" at 11095,11819.95 h75
  text "THE SOLDERMASK SHALL BE BLACK LIQUID PHOTO-IMAGEABLE PER IPC-SM-840, TYPE-B, CLASS 2." at 11345,11819.95 h75
  text "17)" at 11090,11669.95 h75
  text "THE SOLDERMASK REGISTRATION ALLOWANCE IS 0.003\".  THERE SHALL BE NO SOLDERMASK ON" at 11345,11669.95 h75
  text "ANY SOLDER PAD OR LAND." at 11345,11519.95 h75
  text "MARKING" at 11045,11320 h90
  text "18)" at 11090,11124.95 h75
  text "THE LEGEND SHALL BE SCREEN-PRINTED USING PERMANENT YELLOW EPOXY INK." at 11345,11124.95 h75
  text "19)" at 11090,10974.95 h75
  text "THE SCREEN PRINTING REGISTRATION ALLOWANCE IS 0.007\".  THERE SHALL BE NO INK ON ANY" at 11345,10974.95 h75
  text "SOLDER PAD OR LAND." at 11345,10825 h75
  text "20)" at 11080,10674.95 h75
  text "THE VENDOR CODE AND UL FLAMMABILITY RATING MAY BE ETCHED IN THE FOIL OR MARKED IN" at 11345,10674.95 h75
  text "PERMANENT EPOXY INK (VENDOR'S OPTION)." at 11345,10525 h75
  text "ELECTRICAL TESTING" at 11045,10325 h90
  text "21)" at 11090,10129.95 h75
  text "ALL BOARDS SHALL BE ELECTRICALLY TESTED TO THE SUPPLIED IPC-D-356A NET LIST" at 11345,10129.95 h75
  text "FOR CONTINUITY, OPENS AND SHORTS." at 11345,9980 h75
  text "Layer Stack Up Detail for: 780-00002 rev 2" at 11307,9293.25 h87
  text "Layer" at 11307,9142.2 h57
  text "Copper cladding" at 13338,9083 h75
  text "Name" at 11307,9028.2 h57
  text "Top Layer (.GTL)" at 11307,8865.75 h80
  text "1/2 oz. (1 oz. Finished)" at 13395,8838 h80
  text "1/2 oz" at 13404,8655 h80
  text "MidLayer1 (*.G1)" at 11307,8637.25 h80
  text "1/2 oz" at 13404,8434 h80
  text "+12V (*.GP1)" at 11307,8408.75 h80
  text "1/2 oz" at 13432,8241 h80
  text "-12V (*.GP2)" at 11307,8180.25 h80
  text "1/2 oz" at 13432,7987 h80
  text "A & GND (*.GP3)" at 11307,7951.75 h80
  text "2 oz." at 13207,7743 h80
  text "Chassis E (*.GP4)" at 11307,7723.25 h80
  text "2 oz." at 13211,7498 h80
  text "+28V & VCC (*.GP5)" at 11307,7494.75 h80
  text "1/2 oz" at 13395,7292 h80
  text "MidLayer2 (*.G2)" at 11307,7266.25 h80
  text "MidLayer3 (*.G3)" at 11307,7037.75 h80
  text "1/2 oz" at 13390,7019 h80
  text "Bottom Layer (.GBL)" at 11307,6809.25 h80
  text "1/2 oz. (1 oz. Finished)" at 13409,6807 h80
  text "Las Cumbres Observatory, Inc." at 29477,5649 h90
  text "Las Cumbres Observatory" at 27707,5529 h150
  text "PRIMARY PCB SPECIFICATIONS" at 18544,5514 h200
  text "6740 Cortona Dr." at 29917,5495 h90
  text "Global Telescope Network" at 27867,5369 h125
  text "Goleta, CA 93117" at 29867,5345 h90
  text "(REFER TO COMPLETE SPEC LISTING AT LEFT FOR FURTHER DETAILS)" at 18197,5309 h100
  text "www.lcogt.net" at 30007,5199 h90
  text "DATE" at 27532,5088.2 h32
  text "DESIGNED" at 28472,5088.2 h32
  text "DRAWN" at 29552,5088.2 h32
  text "SCALE" at 30632,5088.2 h32
  text "NUMBER OF LAYERS" at 18297,5059 h150
  text "10" at 21847,5058.98 h150
  text "Rich Lobdill" at 29857,4989 h55
  text "Rich Lobdill" at 28732,4984 h55
  text "1 : 1" at 30917,4970 h90
  text "3/9/2010" at 27562,4963 h90
  text "FINISHED THICKNESS" at 18297,4809 h150
  text ".062\"" at 21672,4809 h150
  text "CHECKED/DATE" at 27532,4798.2 h32
  text "APPROVED/DATE" at 29552,4798.2 h32
  text "BASE MATERIAL" at 18297,4559 h150
  text "FR4" at 21597,4559 h150
  text "TITLE" at 27532,4508.2 h32
  text "NOTICE" at 10642,4400 h100
  text "780-00002, CLOCK BOARD" at 27752,4364 h100
  text "GOLD IMMERSION" at 21103,4342 h150
  text "PLATING TYPE" at 18297,4309 h150
  text "THIS DRAWING EMBODIES A PROPRIETARY DESIGN OWNED BY LAS CUMBRES" at 10677,4285 h60
  text "OBSERVATORY.  IT IS SUBMITTED FOR A SPECIFIC PURPOSE UNDER A CON-" at 10677,4185 h60
  text "SIZE" at 27532,4178.2 h32
  text "DOC NO." at 27992,4178.2 h32
  text "REV" at 30072,4178.2 h32
  text "SHEET" at 30532,4178.2 h32
  text "FIDENTIAL RELATIONSHIP, AND EXCEPT FOR PURPOSES EXPRESSLY GRANTED" at 10677,4090 h60
  text "OF" at 30962,4075 h60
  text "SOLDER MASK COLOR" at 18297,4059 h150
  text "BLACK" at 21722,4059 h150
  text "1" at 30792,4055 h100
  text "20" at 31192,4055 h100
  text "2" at 30217,4042 h130
  text "-" at 28547,4040 h130
  text "GPT" at 29266.72,4025.2 h130
  text "C" at 27667,4024 h100
  text "IN WRITING, ALL RIGHTS ARE RESERVED BY LAS CUMBRES OBSERVATORY." at 10677,4000 h60
Mechanical 5:
  text "780-00002 rev2, CLOCK BOARD" at 19827.03,10458.58 h80
  text "LAS CUMBRES OBSERVATORY     3/9/2010" at 19827.03,10308.57 h80
Mechanical 13:
  lines w10: 19254.28,12225.28 19254.28,12388
Drill Drawing:
  lines w10: 10567,3924 10567,19924 31567,19924 31567,3924 10567,3924 ; 27512,4030 ccw(c27562,4030) 27562,3980 27892,3980 ccw(c27892,4020) 27932,4020 27932,4190 ccw(c27892,4190) 27892,4230 27512,4230 27512,4030 ; 27512,4320 ccw(c27562,4320) 27562,4270 31462,4270 ccw(c31462,4320) 31512,4320 31512,4510 ccw(c31462,4510) 31462,4560 27512,4560 27512,4320 ; 27512,4640 ccw(c27552,4640) 27552,4600 28972,4600 ccw(c28972,4650) 29022,4650 29022,4800 ccw(c28972,4800) 28972,4850 27512,4850 27512,4640 ; 27972,4020 ccw(c28012,4020) 28012,3980 29972,3980 ccw(c29972,4020) 30012,4020 30012,4190 ccw(c29972,4190) 29972,4230 27972,4230 27972,4020 ; 29062,4650 ccw(c29112,4650) 29112,4600 30522,4600 ccw(c30522,4650) 30572,4650 30572,4800 ccw(c30522,4800) 30522,4850 29062,4850 29062,4650 ; 30052,4030 ccw(c30102,4030) 30102,3980 30432,3980 ccw(c30432,4020) 30472,4020 30472,4190 ccw(c30432,4190) 30432,4230 30052,4230 30052,4030 ; 30512,4020 ccw(c30552,4020) 30552,3980 31462,3980 ccw(c31462,4030) 31512,4030 31512,4180 ccw(c31462,4180) 31462,4230 30512,4230 30512,4020 ; 30612,4650 ccw(c30662,4650) 30662,4600 31462,4600 ccw(c31462,4650) 31512,4650 31512,4800 ccw(c31462,4800) 31462,4850 30612,4850 30612,4650
  lines w20: 10592.06,4554.88 cw(c10642,4480) 10642,4570 11102,4570 cw(c11102,4480) 11192,4480 11192,4430 ccw(c11202,4430) 11202,4420 13842,4420 cw(c13842,4330) 13932,4330 13932,3990 cw(c13842,3990) 13916.88,3940.06 ; 27466.92,3941.34 cw(c27562,4030) 27432,4030 27432,4850 cw(c27512,4850) 27512,4930 31462,4930 cw(c31462,4800) 31550.66,4895.08 ; 10592,3990 ccw(c10642,3990) 10642,3940 13842,3940 ccw(c13842,3990) 13892,3990 13892,4330 ccw(c13842,4330) 13842,4380 11202,4380 cw(c11202,4430) 11152,4430 11152,4480 ccw(c11102,4480) 11102,4530 10642,4530 ccw(c10642,4480) 10592,4480 10592,3990 ; 27472,4030 ccw(c27562,4030) 27562,3940 31462,3940 ccw(c31462,4030) 31552,4030 31552,4800 ccw(c31462,4800) 31462,4890 27512,4890 ccw(c27512,4850) 27472,4850 27472,4030
  lines w30: 10067,3424 10067,20424 32067,20424 32067,3424 10067,3424
  text ".Legend" at 25953,15231 h100
  text "DESIGNED" at 27532,4798.2 h32
  text "DRAWN" at 29082,4798.2 h32
  text "SCALE" at 30632,4798.2 h32
  text "Rich Lobdill" at 28018,4702 h55
  text "Rich Lobdill" at 29579,4700 h55
  text "1 : 1" at 30917,4680 h90
  text "TITLE" at 27532,4508.2 h32
  text "NOTICE" at 10647,4385 h100
  text "780-00002, CLOCK BOARD" at 27749,4364 h100
  text "THIS DRAWING EMBODIES A PROPRIETARY DESIGN OWNED BY LAS CUMBRES" at 10682,4270 h60
  text "SIZE" at 27532,4178.2 h32
  text "DOC NO." at 27992,4178.2 h32
  text "REV" at 30072,4178.2 h32
  text "SHEET" at 30532,4178.2 h32
  text "OBSERVATORY.  IT IS SUBMITTED FOR A SPECIFIC PURPOSE UNDER A CON-" at 10682,4170 h60
  text "FIDENTIAL RELATIONSHIP, AND EXCEPT FOR PURPOSES EXPRESSLY GRANTED" at 10682,4075 h60
  text "OF" at 30962,4075 h60
  text "2" at 30777,4055 h100
  text "20" at 31192,4055 h100
  text "-" at 28547,4040 h130
  text "B" at 30212,4040 h130
  text "C" at 27667,4024 h120
  text "GD1" at 29367,4024 h120
  text "IN WRITING, ALL RIGHTS ARE RESERVED BY LAS CUMBRES OBSERVATORY." at 10682,3985 h60

## Dimensions
18198,11930.49 to 20757.06,12280.63 on Top Overlay
22528.71,12320 to 22528.71,11926.3 on Mechanical 2
24103.51,11926.3 to 24103.51,16256.2 on Mechanical 2
19254.28,12225.28 to 18198,12320 on Mechanical 2
19283.81,12418.43 to 19284.61,12320 on Mechanical 2
18198,16320.25 to 24103.51,16300.57 on Mechanical 2
19283.81,12418.43 to -3118.27,-3414.51 on Mechanical 2
18198,12320 to 22528.71,11926.3 on Mechanical 2
22528.71,12320 to 22528.71,11926.3 on Mechanical 13

## Text inside footprints (layer, text, board x,y; h text height)
J1: Top Overlay "1" at 21924,12495 h30 r90; Top Overlay "155" at 19606,12488 h30 r90; Top Overlay "PC01" at 22218,12448 h30 r90; Top Overlay "PC07" at 19276,12467 h30 r90
P1: Top Overlay "10" at 23885.72,14827.24 h30 r90; Top Overlay "9" at 23985.72,14827.24 h30 r90; Top Overlay "1" at 23985.72,14287.24 h30 r90; Top Overlay "2" at 23885.72,14267.24 h30 r90
P3: Top Overlay "1" at 24009,14903 h30 r90; Top Overlay "2" at 23819,14903 h30 r90; Top Overlay "23" at 23983,16155 h30 r90; Top Overlay "24" at 23883,16155 h30 r90